# Altium PCB miaow-foc-board.bak.pcbdoc (part 2 of 2)
Units mm, origin at the board's own origin, x right, y up, seen from the top; angles counter-clockwise.
Board outline 70 x 80 mm, 6 copper layers (SIG1, GND2, SIG3, PWR4, GND5, SIG6), stack 1.538 mm thick; 418 components, 393 nets, 2057 pads, 83 vias.
Unrouted connection lines stored in the file: 1269.
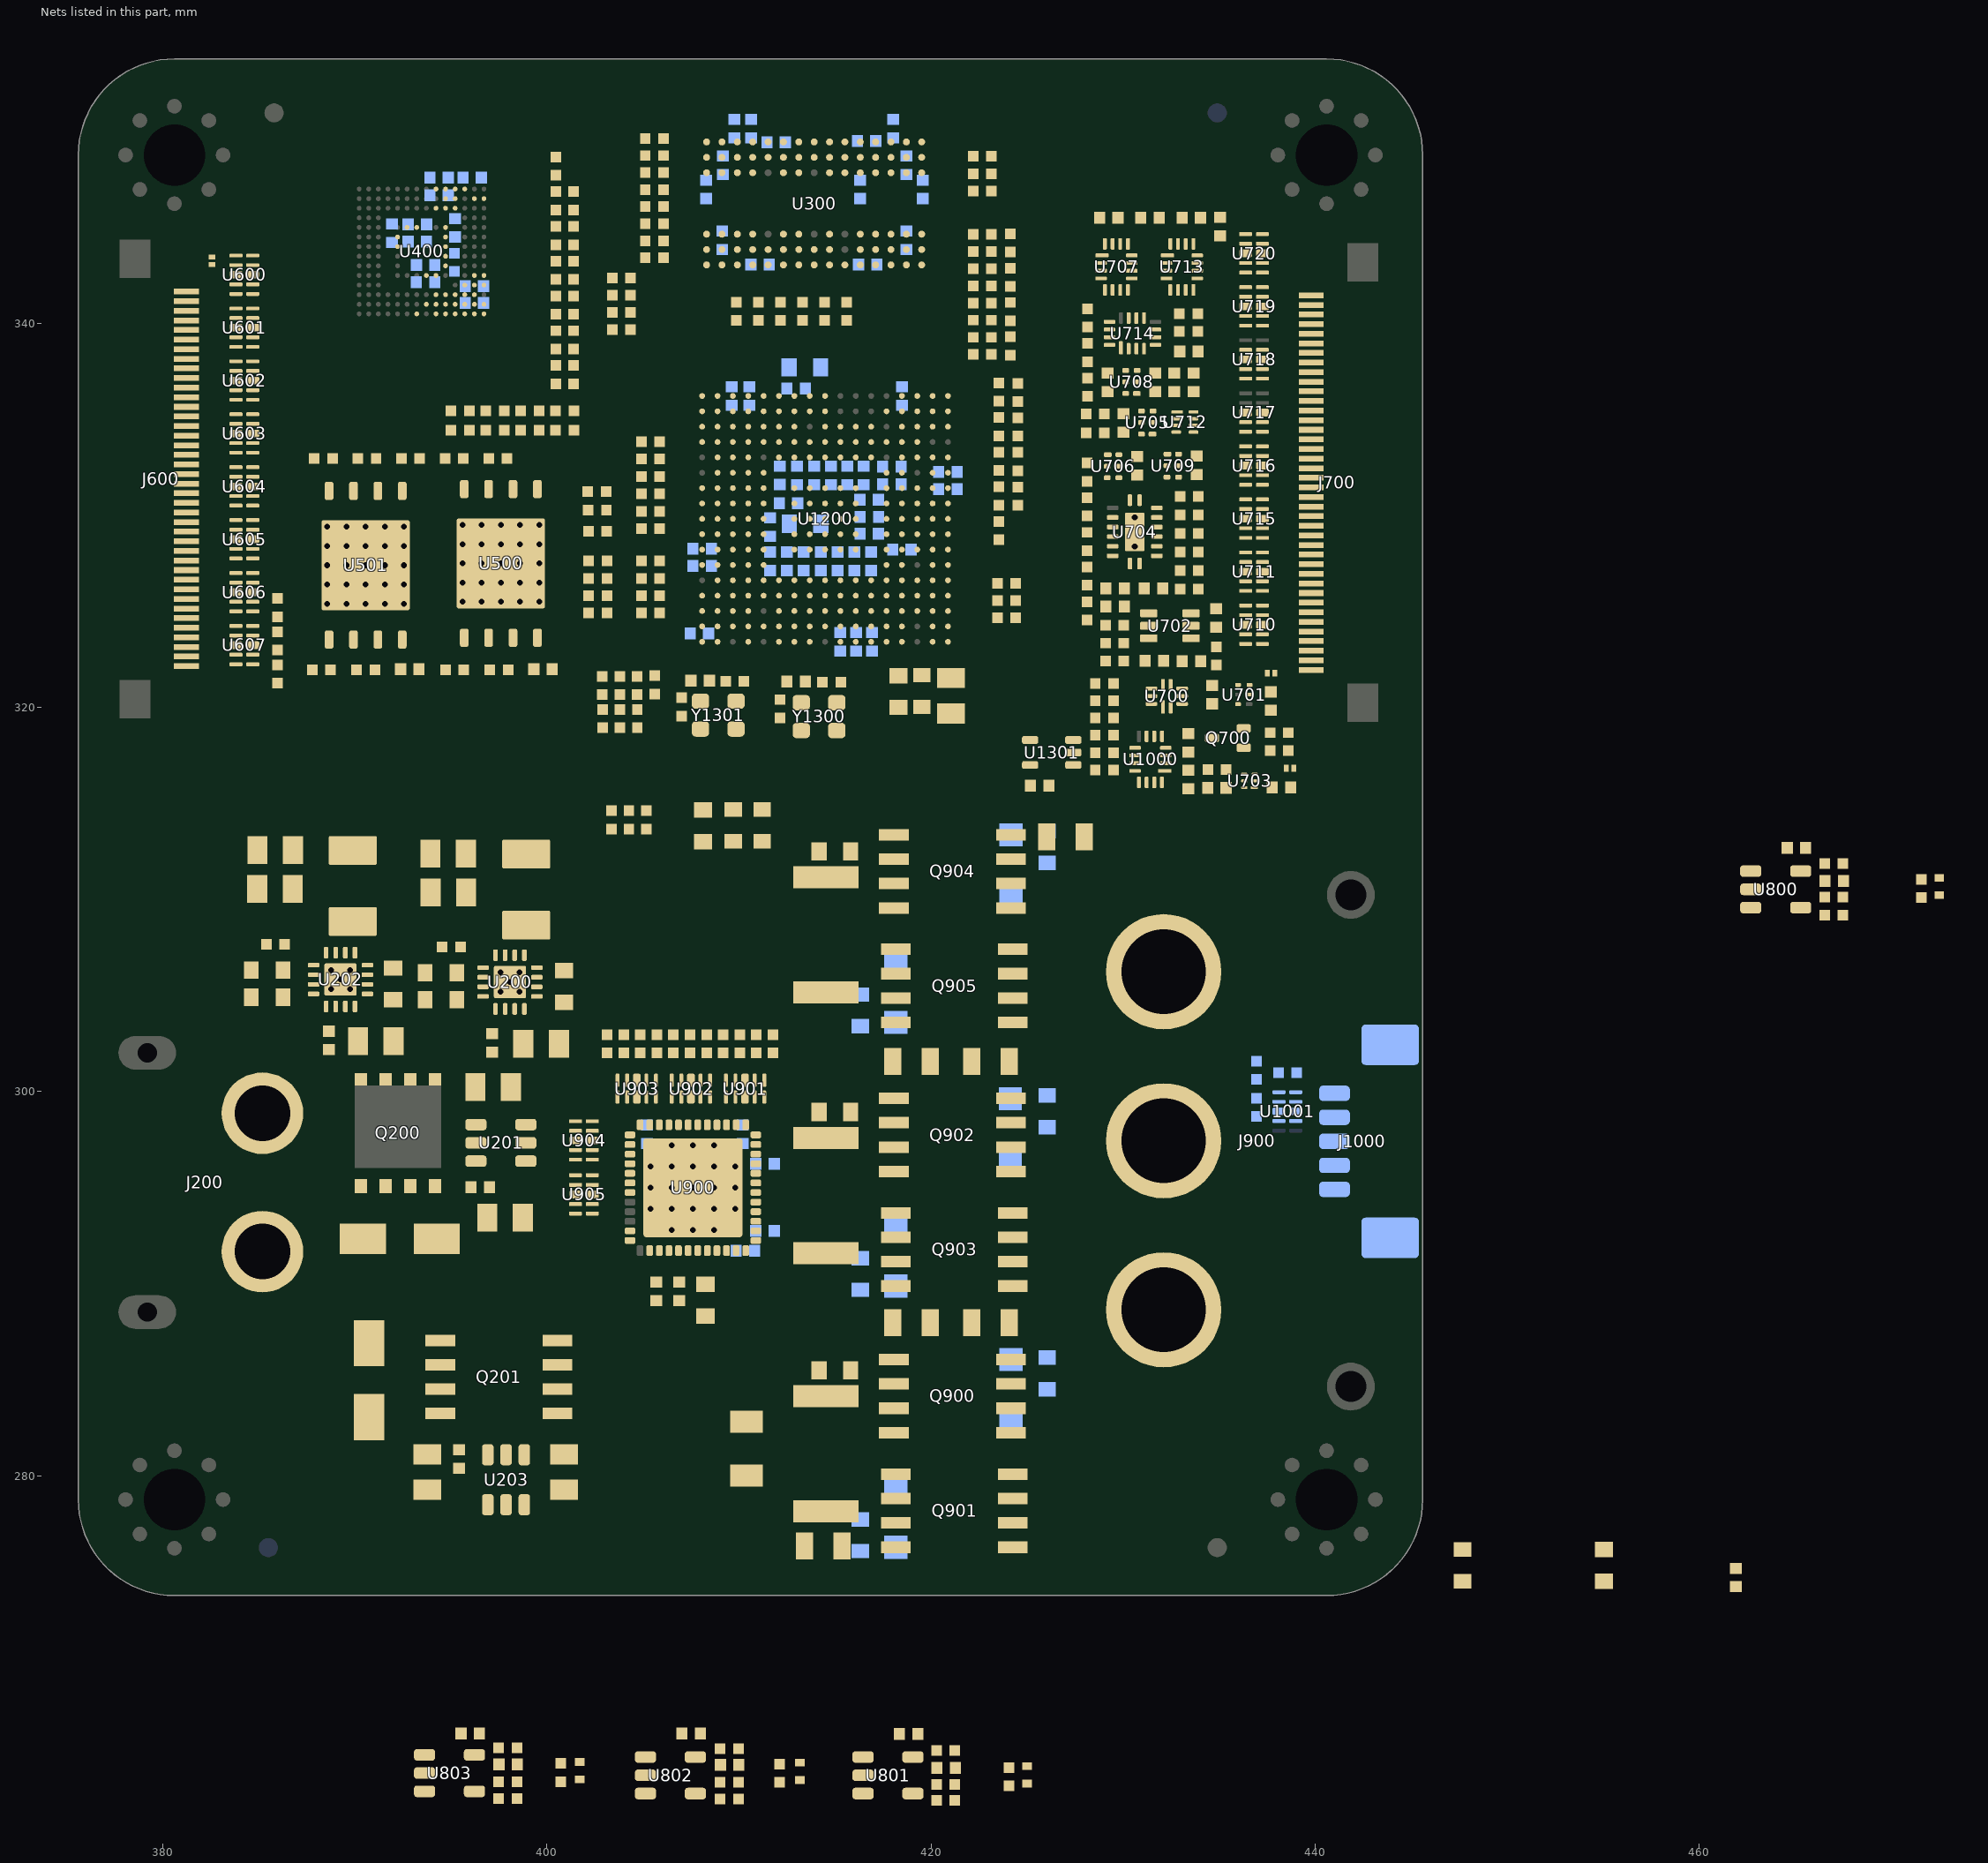
[diagram p5: the nets of this part, all layers, seen from the top]

## Footprints (in the part's own frame and the unit in brackets; to place one, negate y for a bottom-side part, rotate by r counter-clockwise, add the part's x,y. Pads: shape width x height; smd on the part's side, far side on the other; paste and mask are expansions set on the pad) (continued)
STM32H750XBH6 [mm] "BGA, 265-Leads, Body 14.00x14.00mmx1.20mm, Pitch 0.80mm"
  round 0.3 smd: A1(-6.4,6.4) A2(-5.6,6.4) A3(-4.8,6.4) A4(-4,6.4) A5(-3.2,6.4) A6(-2.4,6.4) A7(-1.6,6.4) A8(-0.8,6.4) A9(0,6.4) A10(0.8,6.4) A11(1.6,6.4) A12(2.4,6.4) A13(3.2,6.4) A14(4,6.4) A15(4.8,6.4) A16(5.6,6.4) A17(6.4,6.4) B1(-6.4,5.6) B2(-5.6,5.6) B3(-4.8,5.6) B4(-4,5.6) B5(-3.2,5.6) B6(-2.4,5.6) B7(-1.6,5.6) B8(-0.8,5.6) B9(0,5.6) B10(0.8,5.6) B11(1.6,5.6) B12(2.4,5.6) B13(3.2,5.6) B14(4,5.6) B15(4.8,5.6) B16(5.6,5.6) B17(6.4,5.6) C1(-6.4,4.8) C2(-5.6,4.8) C3(-4.8,4.8) C4(-4,4.8) C5(-3.2,4.8) C6(-2.4,4.8) C7(-1.6,4.8) C8(-0.8,4.8) C9(0,4.8) C10(0.8,4.8) C11(1.6,4.8) C12(2.4,4.8) C13(3.2,4.8) C14(4,4.8) C15(4.8,4.8) C16(5.6,4.8) C17(6.4,4.8) D1(-6.4,4) D2(-5.6,4) D3(-4.8,4) D4(-4,4) D5(-3.2,4) D6(-2.4,4) D7(-1.6,4) D8(-0.8,4) D9(0,4) D10(0.8,4) D11(1.6,4) D12(2.4,4) D13(3.2,4) D14(4,4) D15(4.8,4) D16(5.6,4) D17(6.4,4) E1(-6.4,3.2) E2(-5.6,3.2) E3(-4.8,3.2) E4(-4,3.2) E5(-3.2,3.2) E6(-2.4,3.2) E7(-1.6,3.2) E8(-0.8,3.2) E9(0,3.2) E10(0.8,3.2) E11(1.6,3.2) E12(2.4,3.2) E13(3.2,3.2) E14(4,3.2) E15(4.8,3.2) E16(5.6,3.2) E17(6.4,3.2) F1(-6.4,2.4) F2(-5.6,2.4) F3(-4.8,2.4) F4(-4,2.4) F5(-3.2,2.4) F13(3.2,2.4) F14(4,2.4) F15(4.8,2.4) F16(5.6,2.4) F17(6.4,2.4) G1(-6.4,1.6) G2(-5.6,1.6) G3(-4.8,1.6) G4(-4,1.6) G5(-3.2,1.6) G7(-1.6,1.6) G8(-0.8,1.6) G9(0,1.6) G10(0.8,1.6) G11(1.6,1.6) G13(3.2,1.6) G14(4,1.6) G15(4.8,1.6) G16(5.6,1.6) G17(6.4,1.6) H1(-6.4,0.8) H2(-5.6,0.8) H3(-4.8,0.8) H4(-4,0.8) H5(-3.2,0.8) H7(-1.6,0.8) H8(-0.8,0.8) H9(0,0.8) H10(0.8,0.8) H11(1.6,0.8) H13(3.2,0.8) H14(4,0.8) H15(4.8,0.8) H16(5.6,0.8) H17(6.4,0.8) J1(-6.4,0) J2(-5.6,0) J3(-4.8,0) J4(-4,0) J5(-3.2,0) J7(-1.6,0) J8(-0.8,0) J9(0,0) J10(0.8,0) J11(1.6,0) J13(3.2,0) J14(4,0) J15(4.8,0) J16(5.6,0) J17(6.4,0) K1(-6.4,-0.8) K2(-5.6,-0.8) K3(-4.8,-0.8) K4(-4,-0.8) K5(-3.2,-0.8) K7(-1.6,-0.8) K8(-0.8,-0.8) K9(0,-0.8) K10(0.8,-0.8) K11(1.6,-0.8) K13(3.2,-0.8) K14(4,-0.8) K15(4.8,-0.8) K16(5.6,-0.8) K17(6.4,-0.8) L1(-6.4,-1.6) L2(-5.6,-1.6) L3(-4.8,-1.6) L4(-4,-1.6) L5(-3.2,-1.6) L7(-1.6,-1.6) L8(-0.8,-1.6) L9(0,-1.6) L10(0.8,-1.6) L11(1.6,-1.6) L13(3.2,-1.6) L14(4,-1.6) L15(4.8,-1.6) L16(5.6,-1.6) L17(6.4,-1.6) M1(-6.4,-2.4) M2(-5.6,-2.4) M3(-4.8,-2.4) M4(-4,-2.4) M5(-3.2,-2.4) M13(3.2,-2.4) M14(4,-2.4) M15(4.8,-2.4) M16(5.6,-2.4) M17(6.4,-2.4) N1(-6.4,-3.2) N2(-5.6,-3.2) N3(-4.8,-3.2) N4(-4,-3.2) N5(-3.2,-3.2) N6(-2.4,-3.2) N7(-1.6,-3.2) N8(-0.8,-3.2) N9(0,-3.2) N10(0.8,-3.2) N11(1.6,-3.2) N12(2.4,-3.2) N13(3.2,-3.2) N14(4,-3.2) N15(4.8,-3.2) N16(5.6,-3.2) N17(6.4,-3.2) P1(-6.4,-4) P2(-5.6,-4) P3(-4.8,-4) P4(-4,-4) P5(-3.2,-4) P6(-2.4,-4) P7(-1.6,-4) P8(-0.8,-4) P9(0,-4) P10(0.8,-4) P11(1.6,-4) P12(2.4,-4) P13(3.2,-4) P14(4,-4) P15(4.8,-4) P16(5.6,-4) P17(6.4,-4) R1(-6.4,-4.8) R2(-5.6,-4.8) R3(-4.8,-4.8) R4(-4,-4.8) R5(-3.2,-4.8) R6(-2.4,-4.8) R7(-1.6,-4.8) R8(-0.8,-4.8) R9(0,-4.8) R10(0.8,-4.8) R11(1.6,-4.8) R12(2.4,-4.8) R13(3.2,-4.8) R14(4,-4.8) R15(4.8,-4.8) R16(5.6,-4.8) R17(6.4,-4.8) T1(-6.4,-5.6) T2(-5.6,-5.6) T3(-4.8,-5.6) T4(-4,-5.6) T5(-3.2,-5.6) T6(-2.4,-5.6) T7(-1.6,-5.6) T8(-0.8,-5.6) T9(0,-5.6) T10(0.8,-5.6) T11(1.6,-5.6) T12(2.4,-5.6) T13(3.2,-5.6) T14(4,-5.6) T15(4.8,-5.6) T16(5.6,-5.6) T17(6.4,-5.6) U1(-6.4,-6.4) U2(-5.6,-6.4) U3(-4.8,-6.4) U4(-4,-6.4) U5(-3.2,-6.4) U6(-2.4,-6.4) U7(-1.6,-6.4) U8(-0.8,-6.4) U9(0,-6.4) U10(0.8,-6.4) U11(1.6,-6.4) U12(2.4,-6.4) U13(3.2,-6.4) U14(4,-6.4) U15(4.8,-6.4) U16(5.6,-6.4) U17(6.4,-6.4)
  silkscreen extent -7,-7 7,7, body extent -7,-7 7,7, height 1.2
TLV9061IDBVR [mm] "SOT23, 5-Leads, Body 2.90x2.80mm, Pitch 0.95mm, IPC Medium Density"
  rrect50% 1.1x0.6 smd: 1(-1.3,0.95) 2(-1.3,0) 3(-1.3,-0.95) 4(1.3,-0.95) 5(1.3,0.95)
  silkscreen extent -0.55,0.7 -0.04,1.2, body extent -1.5,-1.53 1.5,1.53, height 1.45
TPESD8004MUTAG [mm]
  rrect45% 0.675x0.2 smd: 1(-0.437,1) 2(-0.437,0.5) 4(-0.437,-0.5) 5(-0.437,-1) 6(0.437,-1) 7(0.437,-0.5) 9(0.437,0.5) 10(0.437,1)
  rrect45% 0.675x0.4 smd paste-0.041: 3(-0.437,0) 8(0.437,0)
  silkscreen extent -0.69,1.32 -0.18,1.32, body extent -0.5,-1.25 0.5,1.25, height 0.5
TPS62130RGTR [mm] "PQFN, 16-Leads, Body 3.00x3.00mm, Pitch 0.50mm, Thermal Pad 1.68x1.68mm, IPC Medium Density"
  rrect50% 0.6x0.24 smd: 1(-1.4,0.75) 2(-1.4,0.25) 3(-1.4,-0.25) 4(-1.4,-0.75) 9(1.4,-0.75) 10(1.4,-0.25) 11(1.4,0.25) 12(1.4,0.75)
  rrect50% 0.24x0.6 smd: 5(-0.75,-1.4) 6(-0.25,-1.4) 7(0.25,-1.4) 8(0.75,-1.4) 13(0.75,1.4) 14(0.25,1.4) 15(-0.25,1.4) 16(-0.75,1.4)
  rrect10% 1.68x1.68 smd paste-2539.97: 17(0,0)
  silkscreen extent -1.55,-1.55 1.55,1.55, body extent -1.55,-1.55 1.55,1.55, height 1
TXB0101DCKR [mm] "SOT23, 6-Leads, Body 2.00x2.10mm, Pitch 0.65mm, IPC Medium Density"
  rrect25% 0.9x0.4 smd: 1(-1.1,0.65) 2(-1.1,0) 3(-1.1,-0.65) 4(1.1,-0.65) 5(1.1,0) 6(1.1,0.65)
  silkscreen extent -0.45,0.4 0.06,0.9, body extent -1.2,-1.07 1.2,1.07, height 1.1
TXS0102DQER [mm] "SON, 8-Leads, Body 1.40x1.00mm, Pitch 0.35mm, IPC Medium Density"
  rrect50% 0.6x0.175 smd: 1(-0.4,0.525)
  rrect50% 0.5x0.175 smd: 2(-0.45,0.175) 3(-0.45,-0.175) 4(-0.45,-0.525) 5(0.45,-0.525) 6(0.45,-0.175) 7(0.45,0.175) 8(0.45,0.525)
  silkscreen extent -0.63,0.83 -0.21,0.83, body extent -0.58,-0.72 0.58,0.72, height 0.4
TXV0106BQBR [mm] "QFN, 16-Leads, Body 2.50x3.50mm, Pitch 0.50mm, Thermal Pad 1.00x2.00mm, IPC Medium Density"
  rrect50% 0.24x0.6 smd: 1(-0.25,1.65) 8(-0.25,-1.65) 9(0.25,-1.65) 16(0.25,1.65)
  rrect50% 0.6x0.24 smd: 2(-1.15,1.25) 3(-1.15,0.75) 4(-1.15,0.25) 5(-1.15,-0.25) 6(-1.15,-0.75) 7(-1.15,-1.25) 10(1.15,-1.25) 11(1.15,-0.75) 12(1.15,-0.25) 13(1.15,0.25) 14(1.15,0.75) 15(1.15,1.25)
  rrect10% 1x2 smd: 17(0,0)
  silkscreen extent -1.3,-1.8 1.3,1.96, body extent -1.35,-1.85 1.35,1.85, height 0.8
XT60PW-M [mm]
  round 4.25 hole 2.9: 1(-3.6,-3) 2(3.6,-3)
  oval 1.75x3 hole 1 slot 2 at 90 deg: 3(-6.75,3) 4(6.75,3)
  body extent -7.95,-4.85 7.95,13.35, height 8.45

## Part data
C200 C201 C205 C206 C207 C210 C211 C212 C214 C215 C216 C300 C301 C302 C303 C304 C305 C306 C307 C308 C309 C310 C311 C312 C313 C400 C401 C402 C403 C404 C405 C406 C407 C408 C409 C410 C500 C501 C700 C701 C702 C703 C704 C705 C706 C707 C708 C709 C710 C711 C712 C713 C714 C715 C716 C717 C718 C719 C720 C721 C800 C801 C802 C803 C804 C805 C806 C807 C900 C901 C902 C903 C904 C905 C906 C907 C908 C909 C910 C911 C1000 C1001 C1200 C1201 C1202 C1203 C1204 C1205 C1206 C1207 C1208 C1209 C1210 C1211 C1212 C1213 C1214 C1215 C1216 C1217 C1218 C1219 C1220 C1221 C1222 C1223 C1224 C1225 C1226 C1227 C1228 C1229 C1230 C1231 C1232 C1233 C1300 C1301 C1302 C1303 C1304 C1305: voltage=25V, precision=5%
C202 C203 C204 C208 C209 C213: voltage=50V, precision=5%
D200 D201: "TVS/ESD", Supplier Part Number 1=C316048, Supplier 1=LCSC
D600 D700 D701: "TVS/ESD", Supplier Part Number 1=C477989, Supplier 1=LCSC
D900 D901 D902 D903 D904 D905: "TVS/ESD", Supplier Part Number 1=C123803, Supplier 1=LCSC
J200: "CONNECTOR - dc supply", Supplier Part Number 1=C98732, Supplier 1=LCSC
J600: library part FPC-RGBLCD, Supplier Part Number 1=C262674, Supplier 1=LCSC
J700: library part FPC-DEBUG, "FPC", Supplier Part Number 1=C262674, Supplier 1=LCSC
J900: "CONNECTOR - 3pin, power", Supplier Part Number 1=C7437310, Supplier 1=LCSC
J1000: "HEADER - 1.25 - 5p", Supplier Part Number 1=C668616, Supplier 1=LCSC, Supplier 2=LCSC, Supplier Part Number 2=C17256390
L202: library part L, Code_IEC=1005, Code_JEITA=0402, LatestRevisionDate=29-May-2009, LatestRevisionNote="IPC-7351 Footprint Added.", PackageDescription="Chip Inductor", PackageReference=0402-A, Published=8-Jun-2000, Publisher="Altium Limited"
Q200: "NMOS", Supplier Part Number 1=C115943, Supplier 1=LCSC
Q201: "NMOS", Supplier Part Number 1=C535695, Supplier 1=LCSC
Q700: "PMOS", Supplier Part Number 1=C5334586, Supplier 1=LCSC
Q900 Q901 Q902 Q903 Q904 Q905: Supplier Part Number 1=C535695, Supplier 1=LCSC
RT800 RT801 RT802 RT803: "NTC - 10K, 3380, 1%", Supplier Part Number 1=C13564, precision=1%, Supplier 1=LCSC
U200 U202: Supplier Part Number 1=C43590, Supplier 1=LCSC
U201 U203: "IDEAL DIODE", Supplier Part Number 1=C2941042, Supplier 1=LCSC
U300: Supplier Part Number 1=C1351419, Supplier 1=LCSC
U400: "EMMC", Supplier Part Number 1=826874-KLMAG2GEND-B031, Supplier 1="Win Source"
U500 U501: Supplier Part Number 1=C2802978, Supplier 1=LCSC
U600 U601 U602 U603 U604 U605 U606 U607 U710 U711 U715 U716 U717 U718 U719 U720 U901 U902 U903 U904 U905 U1001: "TVS/ESD", Supplier Part Number 1=C2827679, Supplier 1=LCSC
U700: "LEVEL SHIFT", Supplier Part Number 1=C1882550, Supplier 1=LCSC
U701: "INVERTER - 1bit schmitt", Supplier Part Number 1=C2878125, Supplier 1=LCSC
U702: "LEVEL SHIFT", Supplier Part Number 1=C324081, Supplier 1=LCSC
U703: "LEVEL SHIFT - 1bit, 0.65V - 3.6V, 500Mbps", Supplier Part Number 1=C2677436, Supplier 1=LCSC
U704: "LEVEL SHIFT", Supplier Part Number 1=C22414342, Supplier 1=LCSC
U705 U706 U708 U709: "SCHMITT - 2bits", Supplier Part Number 1=C548609, Supplier 1=LCSC
U707 U713: "LEVEL SHIFT - 4bits, 0.65V - 3.6V, 310Mbps", Supplier Part Number 1=C779392, Supplier 1=LCSC
U712: Supplier Part Number 1=C2652935, ComponentLink1Description=Datasheet, ComponentLink1URL=..\ds\txs0102dqer.pdf, Supplier 1=LCSC
U714 U1000: "LEVEL SHIFT - 4bits, 2grps, 1.2V - 3.6V, 380Mbps", Supplier Part Number 1=C133244, Supplier 1=LCSC
U800 U801 U802 U803: "OPA - 1ch, 1.8V - 5.5V, r2r, 0.3mV, 10MHz, 10nVHz^0.5, 0.5pA", Supplier Part Number 1=C398358, Supplier 1=LCSC
U900: Supplier Part Number 1=C545497, Supplier 1=LCSC
U1200: "MCU", Supplier Part Number 1=C405932, Supplier 1=LCSC
U1301: "AND GATE  - 1bit", Supplier Part Number 1=C7832, Supplier 1=LCSC
Y1300: Supplier Part Number 1=C717683, Supplier 1=LCSC
Y1301: Supplier Part Number 1=C669098, Supplier 1=LCSC
L200 L201: Code_IEC=1005, Code_JEITA=0402, LatestRevisionDate=29-May-2009, LatestRevisionNote="IPC-7351 Footprint Added.", PackageDescription="Chip Inductor", PackageReference=0402-A, Published=8-Jun-2000, Publisher="Altium Limited"
R200 R201 R202 R203 R204 R205 R206 R207 R400 R401 R402 R403 R404 R405 R406 R407 R408 R409 R410 R411 R412 R413 R414 R415 R416 R417 R418 R419 R420 R421 R500 R501 R502 R503 R504 R505 R506 R507 R508 R600 R601 R602 R700 R701 R702 R703 R704 R705 R706 R707 R708 R709 R710 R711 R712 R713 R714 R715 R800 R801 R802 R803 R804 R805 R806 R807 R808 R809 R810 R811 R812 R813 R814 R815 R900 R901 R902 R903 R904 R905 R906 R907 R908 R909 R910 R911 R912 R913 R914 R915 R916 R917 R918 R919 R920 R921 R922 R923 R924 R925 R926 R927 R1000 R1001 R1002 R1003 R1004 R1005 R1200 R1300 R1301 R1302 R1303 R1304 R1305 R1306 R1307 R1308 R1309 R1310 R1311 R1312 R1313 R1314 R1315 R1316 R1317 R1318 R1319 R1320 R1321 R1322 R1323 R1324 R1325 R1326 R1327 R1328 R1329 R1330 R1331 R1332 R1333 R1334 R1335 R1336 R1337 R1338 R1339 R1340 R1341 R1342 R1343 R1344 R1345 R1346 R1347 R1348 R1349 R1350 R1351 R1352 R1353 R1354 R1355 R1356 R1357 R1358 R1359 R1360 R1361 R1362 R1363 R1364 R1365 R1366 R1367 R1368 R1369 R1370 R1371 R1372 R1373 R1374 R1375 R1376 R1377 R1378 R1379 R1380 R1381 R1382 R1383 R1384 R1385 R1386 R1387: precision=1%

## Via types
v1: diameter 0.45, hole 0.3, SIG1 to SIG6, tented both sides, 60 vias
v2: diameter 0.45, hole 0.3, SIG1 to SIG6, tented top, 21 vias
v3: diameter 0.4, hole 0.3, SIG1 to SIG6, tented both sides, 2 vias

## Nets (pads, with @x,y where several pads share a name; then routed paths per layer and width w, separated by ;. In a path a pad name is that pad's centre, name@x,y a point inside that pad or via, vN(x,y) a via of type N, cw(c..) or ccw(c..) an arc to the next point about the centre after c; other vN are vias at no path point)
9_23: R919.2 U900.23 U901.1 U901.2 U901.9 U901.10
9_24: R917.2 U900.24 U901.4 U901.5 U901.6 U901.7
9_25: R916.2 U900.25 U902.1 U902.2 U902.9 U902.10
9_28: R908.2 U900.28 U902.4 U902.5 U902.6 U902.7
9_29: R913.2 U900.29 U903.1 U903.10
9_30: R1315.2 U900.30 U903.2 U903.9
9_31: R912.2 U900.31 U903.4 U903.7
9_32: R911.2 U900.32 U903.5 U903.6
9_33: R905.2 U900.33 U904.1 U904.10 U1301.4
9_34: U900.34 U904.2 U904.9 U1200.H17
9_37: R1319.2 U900.37 U904.4 U904.7
9_38: R902.2 U900.38 U904.5 U904.6
9_39: R1323.2 U900.39 U905.1 U905.10
9_40: R903.2 U900.40 U905.2 U905.9
9_41: R1326.2 U900.41 U905.4 U905.7
9_42: R904.2 U900.42 U905.5 U905.6
10_1: J1000.1 R1001.2 U1001.1 U1001.10
10_2: J1000.2 R1003.2 U1001.2 U1001.9
10_3: J1000.3 R1005.2 U1001.4 U1001.7
+3V3: C200.2 C201.2 C300.2 C301.2 C302.2 C303.2 C304.2 C305.2 C306.2 C307.2 C308.2 C309.2 C310.2 C311.2 C312.2 C313.2 C400.2 C401.2 C402.2 C403.2 C404.2 C405.2 C406.2 C407.2 C408.2 C409.2 C410.2 C500.2 C501.2 C700.1 C701.2 C702.2 C704.2 C705.1 C706.2 C707.1 C708.1 C709.1 C714.1 C715.2 C716.2 C717.1 C718.1 C719.2 C720.2 C721.1 C802.2 C803.2 C806.2 C807.2 C902.2 C907.1 C1000.2 C1001.1 C1200.2 C1201.2 C1202.2 C1203.2 C1204.2 C1205.2 C1206.2 C1207.2 C1208.2 C1209.2 C1210.2 C1211.2 C1212.2 C1213.2 C1214.2 C1215.2 C1216.2 C1217.2 C1218.2 C1219.2 C1220.2 C1221.2 C1224.2 C1225.2 C1226.2 C1227.2 C1228.2 C1302.2 C1303.1 C1304.1 C1305.1 J600.6 J600.7 J700.6 J700.7 J1000.4 L200.2 L202.1 Q700.S R200.2 R201.2 R400.1 R402.1 R404.1 R406.1 R408.1 R410.1 R412.1 R414.1 R416.1 R420.1 R500.2 R700.1 R800.1 R802.1 R808.1 R810.1 R902.1 R903.1 R904.1 R1372.1 R1383.2 R1386.1 R1387.1 RT800.2 RT801.2 RT802.2 RT803.2 U200.14 U300.A7 U300.B2 U300.B7 U300.C9 U300.D9 U300.E1 U300.F9 U300.L1 U300.L7 U300.M9 U300.N9 U300.P2 U300.P7 U300.R7 U400.B1 U400.C2 U400.C6 U400.E6 U400.F5 U400.J10 U400.K9 U400.M4 U400.N4 U400.P3 U400.P5 U500.8 U501.8 U700.1 U700.6 U700.7 U701.6 U702.1 U702.6 U703.1 U703.5 U703.6 U704.1 U704.16 U707.6 U707.13 U707.14 U707.16 U712.1 U712.8 U713.6 U713.13 U713.14 U713.16 U714.2 U714.3 U714.5 U800.5 U801.5 U802.5 U803.5 U900.26 U900.36 U1000.2 U1000.3 U1200.A6 U1200.B1 U1200.C17 U1200.E6 U1200.E9 U1200.E11 U1200.F5 U1200.F17 U1200.G5 U1200.G13 U1200.G17 U1200.H5 U1200.H13 U1200.J13 U1200.K5 U1200.K13 U1200.L5 U1200.L13 U1200.M5 U1200.M13 U1200.N7 U1200.N8 U1200.N10 U1200.N11 U1200.N12 U1200.P17 U1200.U12 U1301.5 Y1300.4 Y1301.4
+5V: C210.2 C211.2 J600.1 J600.2 J700.1 J700.2 L201.2 R204.2 R205.2 U202.14
_9: J700.9 R701.2 U710.1 U710.10
_10: J700.10 U700.4 U710.2 U710.9
_11: J700.11 R705.2 U710.4 U710.7
_13: J700.13 R707.2 U710.5 U710.6
_14: J700.14 R708.2 U711.1 U711.10
_15: J700.15 R709.2 U711.2 U711.9
_16: J700.16 R710.2 U711.4 U711.7
_17: J700.17 R711.2 U711.5 U711.6
_19: J700.19 U706.4 U715.1 U715.10
_20: J700.20 U706.6 U715.2 U715.9
_21: J700.21 U709.4 U715.4 U715.7
_22: J700.22 U709.6 U715.5 U715.6
_23: J700.23 U705.1 U716.1 U716.10
_24: J700.24 U705.3 U716.2 U716.9
_25: J700.25 U708.1 U716.4 U716.7
_26: J700.26 U708.3 U716.5 U716.6
_27: J700.27 U712.6 U717.1 U717.10
_28: J700.28 U712.7 U717.2 U717.9
_29: J700.29 R713.1 U718.1 U718.10
_30: J700.30 R714.1 U718.2 U718.9
_31: J700.31 U714.9 U718.4 U718.7
_32: J700.32 U707.9 U719.1 U719.10
_33: J700.33 U707.10 U719.2 U719.9
_34: J700.34 U707.11 U719.4 U719.7
_35: J700.35 U707.12 U719.5 U719.6
_37: J700.37 U713.9 U720.1 U720.10
_38: J700.38 U713.10 U720.2 U720.9
_39: J700.39 U713.11 U720.4 U720.7
_40: J700.40 U713.12 U720.5 U720.6
_D3: R407.2 U400.A1 U400.B2
_D4: R409.2 U400.A2 U400.B3
_D5: R411.2 U400.B4 U400.C3 U400.D1 U400.D2
_D6: R413.2 U400.B5 U400.C5
_D7: R415.2 U400.A8 U400.B6 U400.B7
A0: R1363.2 U300.G8
A1: R1365.2 U300.G9
A2: R1366.2 U300.F7
A3: R1367.2 U300.F3
A4: R1368.2 U300.G1
A5: R1369.2 U300.G2
A6: R1379.2 U300.G3
A7: R1380.2 U300.H1
A8: R1382.2 U300.H2
A9: R1384.2 U300.J3
A10: R1301.2 U300.G7
A11: R1304.2 U300.H9
B0: J600.12 U601.1 U601.10 U1200.D11
B1: J600.16 U602.1 U602.10 U1200.C9
B2: J600.19 U602.5 U602.6 U1200.E14
B3: J600.18 U602.4 U602.7 U1200.B10
B4: J600.17 U602.2 U602.9 U1200.C8
B5: J600.15 U601.5 U601.6 U1200.B8
B6: J600.14 U601.4 U601.7 U1200.A8
B7: J600.13 U601.2 U601.9 U1200.C7
BA0: R1309.2 U300.J7
BA1: R1312.2 U300.H8
BL: D600.1 J600.3 U1200.A14
BOOT0: C1302.1 R1385.2 U705.6 U1200.E8
CLK: J600.37 U607.1 U607.10 U1200.H3
CMD: R416.2 R417.1 U1200.C11
D0: R1329.2 U300.R8
D1: R1331.2 U300.N7
D2: R1300.2 U300.R9
D3: R1303.2 U300.N8
D4: R1346.2 U300.P9
D5: R1348.2 U300.M8
D6: R1350.2 U300.M7
D7: R1352.2 U300.L8
D8: R1354.2 U300.L2
D9: R1356.2 U300.M3
D10: R1358.2 U300.M2
D11: R1360.2 U300.P1
D12: R1361.2 U300.N2
D13: R1317.2 U300.R1
D14: R1320.2 U300.N3
D15: R1324.2 U300.R2
D16: R1345.2 U300.E8
D17: R1347.2 U300.D7
D18: R1349.2 U300.D8
D19: R1351.2 U300.B9
D20: R1353.2 U300.C8
D21: R1355.2 U300.A9
D22: R1357.2 U300.C7
D23: R1359.2 U300.A8
D24: R1302.2 U300.A2
D25: R1305.2 U300.C3
D26: R1306.2 U300.A1
D27: R1307.2 U300.C2
D28: R1314.2 U300.B1
D29: R1316.2 U300.D2
D30: R1322.2 U300.D3
D31: R1325.2 U300.E2
DBG_A_RX: U707.3 U1200.U2
DBG_A_TX: U707.4 U1200.A11
DBG_B_RX: U707.1 U1200.P12
DBG_B_TX: U707.2 U1200.P11
DBG_C_RX: U713.3 U1200.N4
DBG_C_TX: U713.4 U1200.N5
DBG_D_RX: U713.1 U1200.D12
DBG_D_TX: U713.2 U1200.C12
DBG_MISO: R715.2 U1200.M3
DBG_MOSI: R1364.2 U714.14
DBG_SCL: U712.3 U1200.R17
DBG_SCLK: R1327.2 U714.15
DBG_SDA: U712.2 U1200.R16
DE: J600.9 U600.2 U600.9 U1200.D7
DM0: R1333.2 U300.K9
DM1: R1335.2 U300.K1
DM2: R1310.2 U300.F8
DM3: R1313.2 U300.F2
DRV_CS: R911.1 R1308.2
DRV_FLT: R908.1 U1200.H16
DRV_PGND: C909.1 C910.1 C911.1 R918.1 U900.12
DRV_PHASE_A: D900.1 J900.3 Q900.1 Q900.2 Q900.3 Q901.5 Q901.6 Q901.7 Q901.8 R901.1 U900.9
DRV_PHASE_B: D902.1 J900.2 Q902.1 Q902.2 Q902.3 Q903.5 Q903.6 Q903.7 Q903.8 R910.1 U900.16
DRV_PHASE_C: D904.1 J900.1 Q904.1 Q904.2 Q904.3 Q905.5 Q905.6 Q905.7 Q905.8 R922.1 U900.19
DRV_SCLK: R912.1 R1311.2
DRV_SDO: R913.1 U1200.R3
DRV_SNS_A: R916.1 U1200.T1
DRV_SNS_B: R917.1 U1200.T2
DRV_SNS_BUS: C908.1 R921.2 R923.2 U1200.U4
DRV_SNS_C: R919.1 U1200.T4
EMMC_CLK: R418.1 U1200.B11
EMMC_D0: R400.2 R401.1 U1200.U15
EMMC_D1: R402.2 R403.1 U1200.T15
EMMC_D2: R404.2 R405.1 U1200.B9
EMMC_D3: R406.2 R407.1 U1200.B7
EMMC_D4: R408.2 R409.1 U1200.D5
EMMC_D5: R410.2 R411.1 U1200.D4
EMMC_D6: R412.2 R413.1 U1200.F14
EMMC_D7: R414.2 R415.1 U1200.F13
EN: C703.1 D700.2 J700.8 R700.2 R703.2 U700.2 U701.2 U704.9 U707.7 U713.7 U714.1 U714.16
ENC_A: R1000.1 U1200.B5
ENC_B: R1002.1 U1200.C5
FR_DBG1: C1301.1 R1383.1 U705.4 U1200.E7
FR_DBG2: U708.6 U1200.E4
FR_DBG3: U708.4 U1200.F4
G0: J600.24 U604.1 U604.10 U1200.T5
G1: J600.20 U603.1 U603.10 U1200.U5
G2: J600.27 U604.5 U604.6 U1200.P5
G3: J600.26 U604.4 U604.7 U1200.A9
G4: J600.25 U604.2 U604.9 U1200.K14
G5: J600.23 U603.5 U603.6 U1200.J14
G6: J600.22 U603.4 U603.7 U1200.J15
G7: J600.21 U603.2 U603.9 U1200.B12
GDRVA: C200.1 C201.1 C202.1 C203.1 C204.1 C205.1 C206.1 C210.1 C211.1 C213.1 C214.1 C215.1 C300.1 C301.1 C302.1 C303.1 C304.1 C305.1 C306.1 C307.1 C308.1 C309.1 C310.1 C311.1 C312.1 C313.1 C400.1 C401.1 C402.1 C403.1 C404.1 C405.1 C406.1 C407.1 C408.1 C409.1 C410.1 C500.1 C501.1 C700.2 C701.1 C702.1 C703.2 C704.1 C705.2 C706.1 C707.2 C708.2 C709.2 C710.1 C711.2 C712.1 C713.1 C714.2 C715.1 C716.1 C717.2 C718.2 C719.1 C720.1 C721.2 C802.1 C803.1 C806.1 C807.1 C902.1 C907.2 C1000.1 C1001.2 C1200.1 C1201.1 C1202.1 C1203.1 C1204.1 C1205.1 C1206.1 C1207.1 C1208.1 C1209.1 C1210.1 C1211.1 C1212.1 C1213.1 C1214.1 C1215.1 C1216.1 C1217.1 C1218.1 C1219.1 C1220.1 C1221.1 C1222.1 C1223.1 C1224.1 C1225.1 C1226.1 C1227.1 C1228.1 C1229.1 C1230.1 C1231.1 C1232.1 C1233.1 C1300.2 C1301.2 C1303.2 C1304.2 C1305.2 D201.1 D600.2 D700.1 D701.2 J600.4 J600.5 J600.36 J700.4 J700.5 J700.12 J700.18 J700.36 J1000.5 J1000.PAD R202.2 R203.1 R206.1 R419.1 R712.2 R804.1 R805.1 R806.1 R807.1 R812.1 R813.1 R814.1 R815.1 R905.1 R1385.1 U200.6 U200.7 U200.8 U200.15 U200.16 U200.17 U201.2 U202.6 U202.7 U202.8 U202.15 U202.16 U202.17 U300.A3 U300.B3 U300.B8 U300.C1 U300.D1 U300.E9 U300.F1 U300.L3 U300.L9 U300.M1 U300.N1 U300.P3 U300.P8 U300.R3 U400.A6 U400.C4 U400.D3 U400.E1 U400.E2 U400.E7 U400.G5 U400.H10 U400.J5 U400.K8 U400.N1 U400.N2 U400.N5 U400.P4 U400.P6 U500.4 U500.9 U501.4 U501.9 U600.3 U600.8 U601.3 U601.8 U602.3 U602.8 U603.3 U603.8 U604.3 U604.8 U605.3 U605.8 U606.3 U606.8 U607.3 U607.8 U700.3 U700.10 U701.3 U702.2 U703.2 U704.8 U704.17 U705.2 U706.2 U707.5 U707.8 U707.15 U708.2 U709.2 U710.3 U710.8 U711.3 U711.8 U712.4 U713.5 U713.8 U713.15 U714.4 U714.10 U714.11 U715.3 U715.8 U716.3 U716.8 U717.3 U717.8 U718.3 U718.8 U719.3 U719.8 U720.3 U720.8 U800.2 U801.2 U802.2 U803.2 U900.27 U900.35 U900.43 U900.47 U900.48 U900.49 U901.3 U901.8 U902.3 U902.8 U903.3 U903.8 U904.3 U904.8 U905.3 U905.8 U1000.1 U1000.4 U1000.5 U1000.10 U1000.11 U1000.12 U1000.16 U1001.3 U1001.8 U1200.A1 U1200.A17 U1200.B2 U1200.B6 U1200.C10 U1200.C13 U1200.C16 U1200.F1 U1200.F2 U1200.G2 U1200.G7 U1200.G8 U1200.G9 U1200.G10 U1200.G11 U1200.G16 U1200.H7 U1200.H8 U1200.H9 U1200.H10 U1200.H11 U1200.J3 U1200.J7 U1200.J8 U1200.J9 U1200.J10 U1200.J11 U1200.J16 U1200.J17 U1200.K7 U1200.K8 U1200.K9 U1200.K10 U1200.K11 U1200.K15 U1200.L7 U1200.L8 U1200.L9 U1200.L10 U1200.L11 U1200.L15 U1200.M15 U1200.N1 U1200.N16 U1200.P1 U1200.R4 U1200.R8 U1200.T12 U1200.U1 U1200.U17 U1301.3 Y1300.2 Y1301.2
  other v1: 397.57,305.205 398.57,305.205 388.749,305.335 389.749,305.335 398.07,305.705 389.249,305.835 397.57,306.205 398.57,306.205 388.749,306.335 389.749,306.335 388.557,325.405 389.557,325.405 390.557,325.405 391.557,325.405 392.557,325.405 395.596,325.5 396.596,325.5 397.596,325.5 398.596,325.5 399.596,325.5 388.557,326.405 389.557,326.405 390.557,326.405 391.557,326.405 392.557,326.405 395.596,326.5 396.596,326.5 397.596,326.5 398.596,326.5 399.596,326.5 388.557,327.405 389.557,327.405 390.557,327.405 391.557,327.405 392.557,327.405 395.596,327.5 396.596,327.5 397.596,327.5 398.596,327.5 399.596,327.5 388.557,328.405 389.557,328.405 390.557,328.405 391.557,328.405 392.557,328.405 395.596,328.5 396.596,328.5 397.596,328.5 398.596,328.5 399.596,328.5 388.557,329.405 389.557,329.405 390.557,329.405 391.557,329.405 392.557,329.405 395.596,329.5 396.596,329.5 397.596,329.5 398.596,329.5 399.596,329.5
  other v2: 406.498,292.798 407.598,292.798 408.698,292.798 405.398,293.898 406.498,293.898 407.598,293.898 408.698,293.898 409.798,293.898 405.398,294.998 406.498,294.998 407.598,294.998 408.698,294.998 409.798,294.998 405.398,296.098 406.498,296.098 407.598,296.098 408.698,296.098 409.798,296.098 406.498,297.198 407.598,297.198 408.698,297.198
  other v3: 430.604,328.381 430.604,329.905
GDRVP: C208.1 C209.1 C216.1 C900.1 C901.1 C904.1 C906.1 C908.2 D200.1 J200.1 R202.1 R923.1 R926.1 R927.1 U203.2 U900.2 U900.13 U900.22
HSYNC: J600.11 U600.5 U600.6 U1200.H1
LCD_INT: R600.2 U1200.D10
LCD_R0: J600.28 U605.1 U605.10 U1200.D9
LCD_R1: J600.32 U606.1 U606.10 U1200.N6
LCD_R2: J600.35 U606.5 U606.6 U1200.P6
LCD_R3: J600.34 U606.4 U606.7 U1200.T6
LCD_R4: J600.33 U606.2 U606.9 U1200.U6
LCD_R5: J600.31 U605.5 U605.6 U1200.U7
LCD_R6: J600.30 U605.4 U605.7 U1200.E15
LCD_R7: J600.29 U605.2 U605.9 U1200.G15
LCD_RST: J600.8 U600.1 U600.10 U1200.E10
LCD_SCL: R601.2 U1200.P3
LCD_SDA: R602.2 U1200.P4
LCD_VSYNC: J600.10 U600.4 U600.7 U1200.H2
NEN: U701.4 U702.5 U712.5
NetC202_2: C202.2 C207.1 C209.2 C212.1 D200.2 D201.2 J200.2 Q200.1 Q200.2 Q200.3 Q201.1 Q201.2 Q201.3 U201.3 U201.6 U203.3 U203.6
NetC206_2: C206.2 U200.9
NetC207_2: C207.2 U201.1
NetC212_2: C212.2 U203.1
NetC215_2: C215.2 U202.9
NetC216_2: C216.2 R207.2
NetC800_2: C800.2 R800.2 R801.2 R804.2 U800.4
NetC801_2: C801.2 R802.2 R803.2 R805.2 U801.4
NetC804_1: C804.1 R809.1 U802.1
NetC804_2: C804.2 R808.2 R809.2 R812.2 U802.4
NetC805_1: C805.1 R811.1 U803.1
NetC805_2: C805.2 R810.2 R811.2 R813.2 U803.4
NetC903_1: C903.1 U900.5
NetC905_1: C905.1 U900.3
NetC905_2: C905.2 U900.4
NetC909_2: C909.2 D901.1 Q901.1 Q901.2 Q901.3 R907.1 R918.2 U900.11
NetC910_2: C910.2 D903.1 Q903.1 Q903.2 Q903.3 R915.1 R926.2 U900.14
NetC911_2: C911.2 D905.1 Q905.1 Q905.2 Q905.3 R925.1 R927.2 U900.21
NetC1222_2: C1222.2 U1200.U11
NetC1223_2: C1223.2 U1200.D17
NetC1229_2: C1229.2 U1200.A7
NetD701_1: D701.1 J700.3 U703.3
NetD900_2: D900.2 Q900.4 R900.2 R901.2
NetD901_2: D901.2 Q901.4 R906.2 R907.2
NetD902_2: D902.2 Q902.4 R909.2 R910.2
NetD903_2: D903.2 Q903.4 R914.2 R915.2
NetD904_2: D904.2 Q904.4 R920.2 R922.2
NetD905_2: D905.2 Q905.4 R924.2 R925.2
NetL200_1: L200.1 U200.1 U200.2 U200.3
NetL201_1: L201.1 U202.1 U202.2 U202.3
NetQ200_4: Q200.4 U201.5
NetQ201_4: Q201.4 U203.5
NetQ700_G: Q700.G R703.1
NetR200_1: R200.1 U200.4
NetR201_1: R201.1 R203.2 U200.5
NetR204_1: R204.1 U202.4
NetR205_1: R205.1 R206.2 U202.5
NetR401_2: R401.2 U400.A3
NetR403_2: R403.2 U400.A4
NetR405_2: R405.2 U400.A5
NetR417_2: R417.2 U400.M5
NetR418_2: R418.2 U400.M6
NetR419_2: R419.2 U400.H5
NetR421_2: R421.2 U400.K5
NetR501_2: R501.2 U500.5
NetR502_2: R502.2 U501.5
NetR503_2: R503.2 U500.2
NetR504_2: R504.2 U501.2
NetR505_2: R505.2 U500.3
NetR506_2: R506.2 U501.3
NetR507_2: R507.2 U500.7
NetR508_2: R508.2 U501.7
NetR701_1: R701.1 U700.5
NetR702_2: R702.2 U700.9
NetR704_2: R704.2 U702.3
NetR705_1: R705.1 U702.4
NetR706_2: R706.2 U703.4
NetR707_1: R707.1 U704.2
NetR708_1: R708.1 U704.3
NetR709_1: R709.1 U704.4
NetR710_1: R710.1 U704.5
NetR711_1: R711.1 U704.6
NetR712_1: R712.1 U704.7
NetR713_2: R713.2 U714.6
NetR714_2: R714.2 U714.7
NetR715_1: R715.1 U714.13
NetR806_2: R806.2 RT800.1 U800.3
NetR807_2: R807.2 RT801.1 U801.3
NetR814_2: R814.2 RT802.1 U802.3
NetR815_2: R815.2 RT803.1 U803.3
NetR900_1: R900.1 U900.8
NetR906_1: R906.1 U900.10
NetR909_1: R909.1 U900.17
NetR914_1: R914.1 U900.15
NetR920_1: R920.1 U900.18
NetR924_1: R924.1 U900.20
NetR1000_2: R1000.2 U1000.6
NetR1001_1: R1001.1 U1000.15
NetR1002_2: R1002.2 U1000.7
NetR1003_1: R1003.1 U1000.14
NetR1004_1: R1004.1
NetR1004_2: R1004.2 U1000.9
NetR1005_1: R1005.1 U1000.13
NetR1300_1: R1300.1 U1200.D13
NetR1301_1: R1301.1 U1200.T8
NetR1302_1: R1302.1 U1200.A16
NetR1303_1: R1303.1 U1200.E12
NetR1304_1: R1304.1 U1200.U8
NetR1305_1: R1305.1 U1200.A15
NetR1306_1: R1306.1 U1200.B15
NetR1307_1: R1307.1 U1200.C14
NetR1308_1: R1308.1 U1200.U3
NetR1309_1: R1309.1 U1200.H14
NetR1310_1: R1310.1 U1200.A4
NetR1311_1: R1311.1 U1200.T3
NetR1312_1: R1312.1 U1200.G14
NetR1313_1: R1313.1 U1200.A3
NetR1314_1: R1314.1 U1200.A2
NetR1315_1: R1315.1 U1200.R5
NetR1316_1: R1316.1 U1200.B3
NetR1317_1: R1317.1 U1200.U16
NetR1318_1: R1318.1 U1200.F15
NetR1319_1: R1319.1 U1200.D15
NetR1320_1: R1320.1 U1200.T17
NetR1321_1: R1321.1 U1200.A10
NetR1322_1: R1322.1 U1200.E2
NetR1323_1: R1323.1 U1200.D14
NetR1324_1: R1324.1 U1200.T16
NetR1325_1: R1325.1 U1200.F3
NetR1326_1: R1326.1 U1200.E17
NetR1327_1: R1327.1 U1200.E16
NetR1328_1: R1328.1 U1200.C15
NetR1329_1: R1329.1 U1200.P16
NetR1330_1: R1330.1 U1200.D8
NetR1331_1: R1331.1 U1200.P15
NetR1332_1: R1332.1 U1200.D6
NetR1333_1: R1333.1 U1200.C4
NetR1334_1: R1334.1 U1200.N2
NetR1335_1: R1335.1 U1200.B4
NetR1336_1: R1336.1 U1200.P2
NetR1337_1: R1337.1 U1200.C3
NetR1338_1: R1338.1 U1200.C6
NetR1339_1: R1339.1 U1200.D3
NetR1340_1: R1340.1 U1200.D2
NetR1341_1: R1341.1 U1200.T11
NetR1342_1: R1342.1 U1200.D1
NetR1343_1: R1343.1 U1200.U13
NetR1344_1: R1344.1 U1200.E5
NetR1345_1: R1345.1 U1200.T13
NetR1346_1: R1346.1 U1200.U9
NetR1347_1: R1347.1 U1200.R13
NetR1348_1: R1348.1 U1200.T9
NetR1349_1: R1349.1 U1200.P13
NetR1350_1: R1350.1 U1200.P9
NetR1351_1: R1351.1 U1200.P14
NetR1352_1: R1352.1 U1200.N9
NetR1353_1: R1353.1 U1200.R14
NetR1354_1: R1354.1 U1200.P10
NetR1355_1: R1355.1 U1200.D16
NetR1356_1: R1356.1 U1200.R10
NetR1357_1: R1357.1 U1200.B17
NetR1358_1: R1358.1 U1200.T10
NetR1359_1: R1359.1 U1200.B16
NetR1360_1: R1360.1 U1200.U10
NetR1361_1: R1361.1 U1200.R11
NetR1362_1: R1362.1 U1200.L2
NetR1363_1: R1363.1 U1200.G4
NetR1364_1: R1364.1 U1200.M2
NetR1365_1: R1365.1 U1200.G3
NetR1366_1: R1366.1 U1200.G1
NetR1367_1: R1367.1 U1200.H4
NetR1368_1: R1368.1 U1200.J5
NetR1369_1: R1369.1 U1200.J4
NetR1370_1: R1370.1 U1200.K2
NetR1371_1: R1371.1 U1200.K3
NetR1373_1: R1373.1 U1200.K4
NetR1374_1: R1374.1 U1200.L4
NetR1375_1: R1375.1 U1200.L3
NetR1376_1: R1376.1 U1200.J2
NetR1376_2: R1376.2 Y1300.3
NetR1377_1: R1377.1 U1200.B13
NetR1378_1: R1378.1 U1200.T7
NetR1379_1: R1379.1 U1200.R7
NetR1380_1: R1380.1 U1200.P7
NetR1381_1: R1381.1 Y1301.3
NetR1381_2: R1381.2 U1200.C2
NetR1382_1: R1382.1 U1200.P8
NetR1384_1: R1384.1 U1200.R9
NetR1386_2: R1386.2 Y1300.1
NetR1387_2: R1387.2 Y1301.1
NOR_CS: R500.1 R1377.2 U500.1 U501.1
NOR_IO0: R501.1 R1373.2
NOR_IO1: R503.1 R1374.2
NOR_IO2: R505.1 R1371.2
NOR_IO3: R507.1 R1370.2
NOR_IO4: R502.1 R1334.2
NOR_IO5: R504.1 R1336.2
NOR_IO6: R506.1 R1321.2
NOR_IO7: R508.1 R1330.2
NOR_SCLK: R1375.2 U500.6 U501.6
NRST: C1300.1 R420.2 R421.1 R706.1 R1372.2 U1200.K1 U1301.1
SDRAM_CAS: R1332.2 U300.K7
SDRAM_CKE: R1343.2 U300.J2
SDRAM_CLK: R1318.2 U300.J1
SDRAM_CS: R1341.2 U300.J8
SDRAM_RAS: R1378.2 U300.J9
SDRAM_WE: R1362.2 U300.K8
SWCLK: R702.1 U1200.B14
SWDIO: R704.1 R1328.2
SWO: R1338.2 U700.8
T0: R1339.2 U704.14
T1: R1340.2 U704.13
T2: R1342.2 U704.12
T3: R1344.2 U704.11
T_INT: J600.38 R600.1 U607.2 U607.9
T_SCL: J600.39 R601.1 U607.4 U607.7
T_SDA: J600.40 R602.1 U607.5 U607.6
TCLK: R1337.2 U704.15
TMP_CH0: C801.1 R803.1 U801.1 U1200.N3
TMP_CH1: C800.1 R801.1 U800.1 U1200.M4
TO_DBG0: U706.1 U1200.R15
TO_DBG1: U706.3 U1200.N14
TO_DBG2: U709.1 U1200.M14
TO_DBG3: U709.3 U1200.L14
TO_DRV_EN: U1200.F16 U1301.2
VBAT: C203.2 C204.2 C205.2 C213.2 C214.2 Q200.5 Q200.6 Q200.7 Q200.8 U200.10 U200.11 U200.12 U200.13 U201.4 U202.10 U202.11 U202.12 U202.13
VDBG_C: C710.2 C711.1 C712.2 C713.2 Q700.D U705.5 U706.5 U708.5 U709.5
VMCUA: C1230.2 C1231.2 L202.2 R1200.1 U1200.L1
VMOT: C208.2 C900.2 C901.2 C903.2 C904.2 C906.2 Q201.5 Q201.6 Q201.7 Q201.8 Q900.5 Q900.6 Q900.7 Q900.8 Q902.5 Q902.6 Q902.7 Q902.8 Q904.5 Q904.6 Q904.7 Q904.8 R207.1 R921.1 U203.4 U900.6 U900.7
VREF+: C1232.2 C1233.2 R1200.2 U1200.M1
pads on no net: J200.3 J200.4 J600. J700. J900. MARKPOINT1400. MARKPOINT1401. MARKPOINT1402. MARKPOINT1403. POSHOLE1400. POSHOLE1401. POSHOLE1402. POSHOLE1403. Q200. U300.E3 U300.E7 U300.H3 U300.H7 U300.K2 U300.K3 U400.A7 U400.A9 U400.A10 U400.A11 U400.A12 U400.A13 U400.A14 U400.B8 U400.B9 U400.B10 U400.B11 U400.B12 U400.B13 U400.B14 U400.C1 U400.C7 U400.C8 U400.C9 U400.C10 U400.C11 U400.C12 U400.C13 U400.C14 U400.D4 U400.D12 U400.D13 U400.D14 U400.E3 U400.E5 U400.E8 U400.E9 U400.E10 U400.E12 U400.E13 U400.E14 U400.F1 U400.F2 U400.F3 U400.F10 U400.F12 U400.F13 U400.F14 U400.G1 U400.G2 U400.G3 U400.G10 U400.G12 U400.G13 U400.G14 U400.H1 U400.H2 U400.H3 U400.H12 U400.H13 U400.H14 U400.J1 U400.J2 U400.J3 U400.J12 U400.J13 U400.J14 U400.K1 U400.K2 U400.K3 U400.K6 U400.K7 U400.K10 U400.K12 U400.K13 U400.K14 U400.L1 U400.L2 U400.L3 U400.L12 U400.L13 U400.L14 U400.M1 U400.M2 U400.M3 U400.M7 U400.M8 U400.M9 U400.M10 U400.M11 U400.M12 U400.M13 U400.M14 U400.N3 U400.N6 U400.N7 U400.N8 U400.N9 U400.N10 U400.N11 U400.N12 U400.N13 U400.N14 U400.P1 U400.P2 U400.P7 U400.P8 U400.P9 U400.P10 U400.P11 U400.P12 U400.P13 U400.P14 U701.1 U701.5 U704.10 U714.8 U714.12 U717.4 U717.5 U717.6 U717.7 U718.5 U718.6 U900.1 U900.44 U900.45 U900.46 U1000.8 U1001.5 U1001.6 U1200.A5 U1200.A12 U1200.A13 U1200.C1 U1200.E1 U1200.E3 U1200.E13 U1200.H15 U1200.J1 U1200.K16 U1200.K17 U1200.L16 U1200.L17 U1200.M16 U1200.M17 U1200.N13 U1200.N15 U1200.N17 U1200.R1 U1200.R2 U1200.R6 U1200.R12 U1200.T14 U1200.U14

## Polygon pours and split planes (outlines as drawn)
GDRVA on GND2 (split plane): 440.89,353.247 441.182,353.218 441.472,353.171 441.759,353.104 442.04,353.018 442.315,352.915 442.583,352.794 442.842,352.655 443.092,352.5 443.33,352.329 443.558,352.142 443.772,351.941 443.973,351.727 444.16,351.499 444.331,351.261 444.486,351.011 444.625,350.752 444.746,350.484 444.849,350.209 444.935,349.928 445.002,349.641 445.049,349.351 445.078,349.059 445.087,348.783 445.086,348.765 445.086,278.765 445.087,278.747 445.078,278.471 445.049,278.179 445.002,277.889 444.935,277.602 444.849,277.321 444.746,277.046 444.625,276.778 444.486,276.519 444.331,276.269 444.16,276.031 443.973,275.803 443.772,275.589 443.558,275.388 443.33,275.201 443.092,275.03 442.842,274.875 442.583,274.736 442.315,274.615 442.04,274.512 441.759,274.426 441.472,274.359 441.182,274.312 440.89,274.283 440.614,274.274 440.596,274.275 380.596,274.275 380.578,274.274 380.302,274.283 380.01,274.312 379.72,274.359 379.433,274.426 379.152,274.512 378.877,274.615 378.609,274.736 378.35,274.875 378.1,275.03 377.862,275.201 377.634,275.388 377.42,275.589 377.219,275.803 377.032,276.031 376.861,276.269 376.706,276.519 376.567,276.778 376.446,277.046 376.343,277.321 376.257,277.602 376.19,277.889 376.143,278.179 376.114,278.471 376.105,278.747 376.106,278.765 376.106,348.765 376.105,348.783 376.114,349.059 376.143,349.351 376.19,349.641 376.257,349.928 376.343,350.209 376.446,350.484 376.567,350.752 376.706,351.011 376.861,351.261 377.032,351.499 377.219,351.727 377.42,351.941 377.634,352.142 377.862,352.329 378.1,352.5 378.35,352.655 378.609,352.794 378.877,352.915 379.152,353.018 379.433,353.104 379.72,353.171 380.01,353.218 380.302,353.247 380.578,353.256 380.596,353.255 440.596,353.255 440.614,353.256
no net on PWR4 (split plane): 440.887,353.205 441.177,353.177 441.464,353.129 441.748,353.063 442.026,352.979 442.299,352.876 442.564,352.756 442.821,352.619 443.068,352.465 443.305,352.295 443.53,352.111 443.742,351.912 443.942,351.699 444.126,351.474 444.296,351.237 444.45,350.99 444.587,350.733 444.707,350.468 444.81,350.195 444.894,349.917 444.96,349.633 445.008,349.346 445.036,349.056 445.045,348.779 445.044,348.765 445.044,278.765 445.045,278.751 445.036,278.474 445.008,278.184 444.96,277.897 444.894,277.613 444.81,277.335 444.707,277.062 444.587,276.797 444.45,276.54 444.296,276.293 444.126,276.056 443.942,275.831 443.742,275.618 443.53,275.419 443.305,275.235 443.068,275.065 442.821,274.911 442.564,274.774 442.299,274.654 442.026,274.551 441.748,274.467 441.464,274.401 441.177,274.353 440.887,274.325 440.61,274.316 440.596,274.317 380.596,274.317 380.582,274.316 380.305,274.325 380.015,274.353 379.728,274.401 379.444,274.467 379.166,274.551 378.893,274.654 378.628,274.774 378.371,274.911 378.124,275.065 377.887,275.235 377.662,275.419 377.449,275.618 377.25,275.831 377.066,276.056 376.896,276.293 376.742,276.54 376.605,276.797 376.485,277.062 376.382,277.335 376.298,277.613 376.232,277.897 376.184,278.184 376.156,278.474 376.147,278.751 376.148,278.765 376.148,348.765 376.147,348.779 376.156,349.056 376.184,349.346 376.232,349.633 376.298,349.917 376.382,350.195 376.485,350.468 376.605,350.733 376.742,350.99 376.896,351.237 377.066,351.474 377.25,351.699 377.449,351.912 377.662,352.111 377.887,352.295 378.124,352.465 378.371,352.619 378.628,352.756 378.893,352.876 379.166,352.979 379.444,353.063 379.728,353.129 380.015,353.177 380.305,353.205 380.582,353.214 380.596,353.213 440.596,353.213 440.61,353.214
no net on GND5 (split plane): 440.89,353.247 441.182,353.218 441.472,353.171 441.759,353.104 442.04,353.018 442.315,352.915 442.583,352.794 442.842,352.655 443.092,352.5 443.33,352.329 443.558,352.142 443.772,351.941 443.973,351.727 444.16,351.499 444.331,351.261 444.486,351.011 444.625,350.752 444.746,350.484 444.849,350.209 444.935,349.928 445.002,349.641 445.049,349.351 445.078,349.059 445.087,348.783 445.086,348.765 445.086,278.765 445.087,278.747 445.078,278.471 445.049,278.179 445.002,277.889 444.935,277.602 444.849,277.321 444.746,277.046 444.625,276.778 444.486,276.519 444.331,276.269 444.16,276.031 443.973,275.803 443.772,275.589 443.558,275.388 443.33,275.201 443.092,275.03 442.842,274.875 442.583,274.736 442.315,274.615 442.04,274.512 441.759,274.426 441.472,274.359 441.182,274.312 440.89,274.283 440.614,274.274 440.596,274.275 380.596,274.275 380.578,274.274 380.302,274.283 380.01,274.312 379.72,274.359 379.433,274.426 379.152,274.512 378.877,274.615 378.609,274.736 378.35,274.875 378.1,275.03 377.862,275.201 377.634,275.388 377.42,275.589 377.219,275.803 377.032,276.031 376.861,276.269 376.706,276.519 376.567,276.778 376.446,277.046 376.343,277.321 376.257,277.602 376.19,277.889 376.143,278.179 376.114,278.471 376.105,278.747 376.106,278.765 376.106,348.765 376.105,348.783 376.114,349.059 376.143,349.351 376.19,349.641 376.257,349.928 376.343,350.209 376.446,350.484 376.567,350.752 376.706,351.011 376.861,351.261 377.032,351.499 377.219,351.727 377.42,351.941 377.634,352.142 377.862,352.329 378.1,352.5 378.35,352.655 378.609,352.794 378.877,352.915 379.152,353.018 379.433,353.104 379.72,353.171 380.01,353.218 380.302,353.247 380.578,353.256 380.596,353.255 440.596,353.255 440.614,353.256

## Silkscreen, mask and mechanical layers (free items; w line width, h text height)
Mechanical 1:
  the board outline again, w0.254